# Altium PCB MANWOLF.PcbDoc
Units mm, origin at the board's own origin, x right, y up, seen from the top; angles counter-clockwise.
Board outline 152.4 x 101.6 mm, 4 copper layers (Top Layer, Signal Layer 1, Signal Layer 2, Bottom Layer), stack 0.778 mm thick; 93 components, 122 nets, 420 pads, 48 vias.
Unrouted connection lines stored in the file: 131.
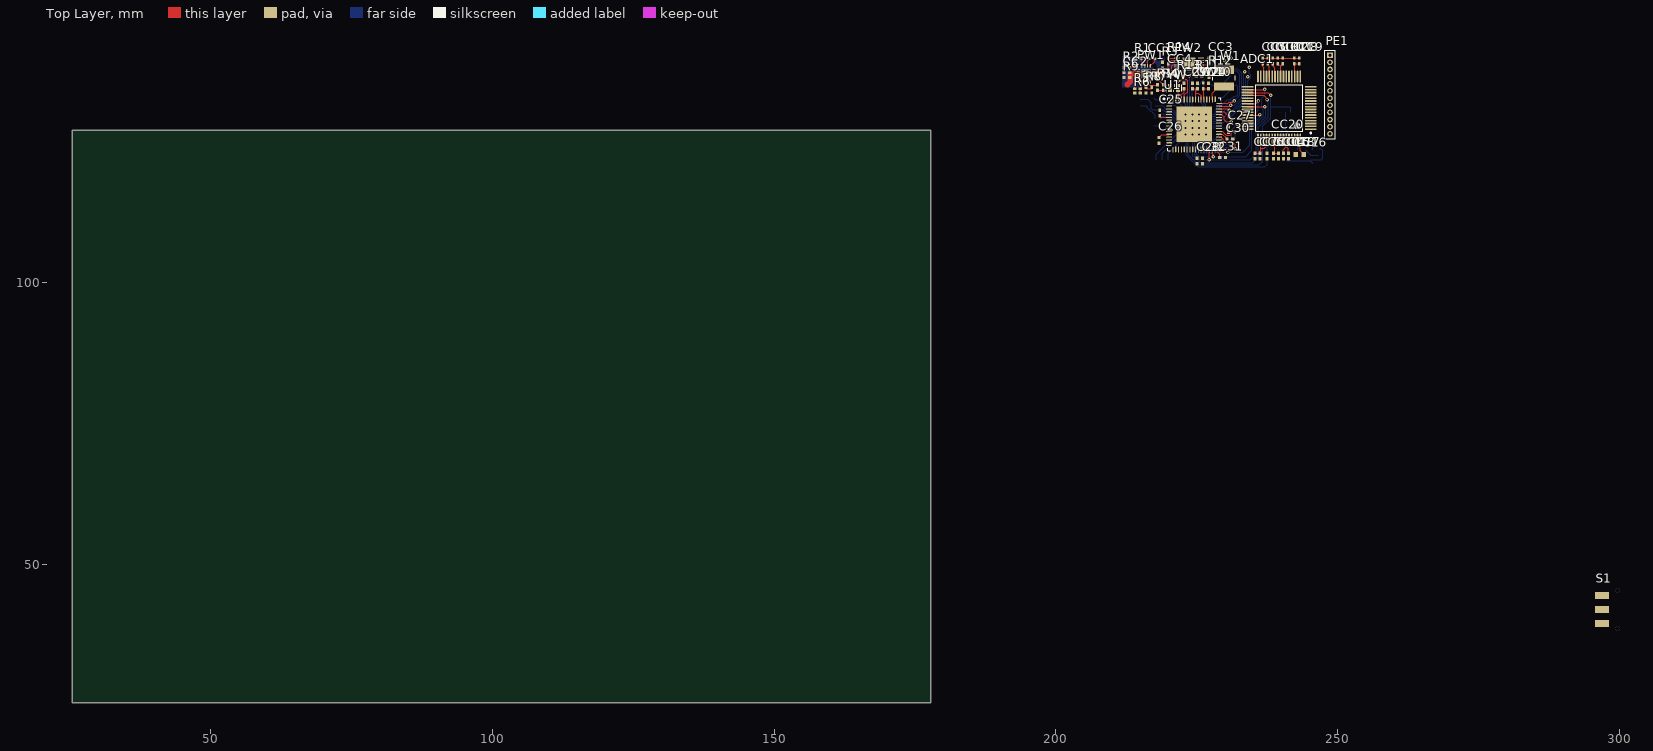
[diagram p0: Top Layer view]
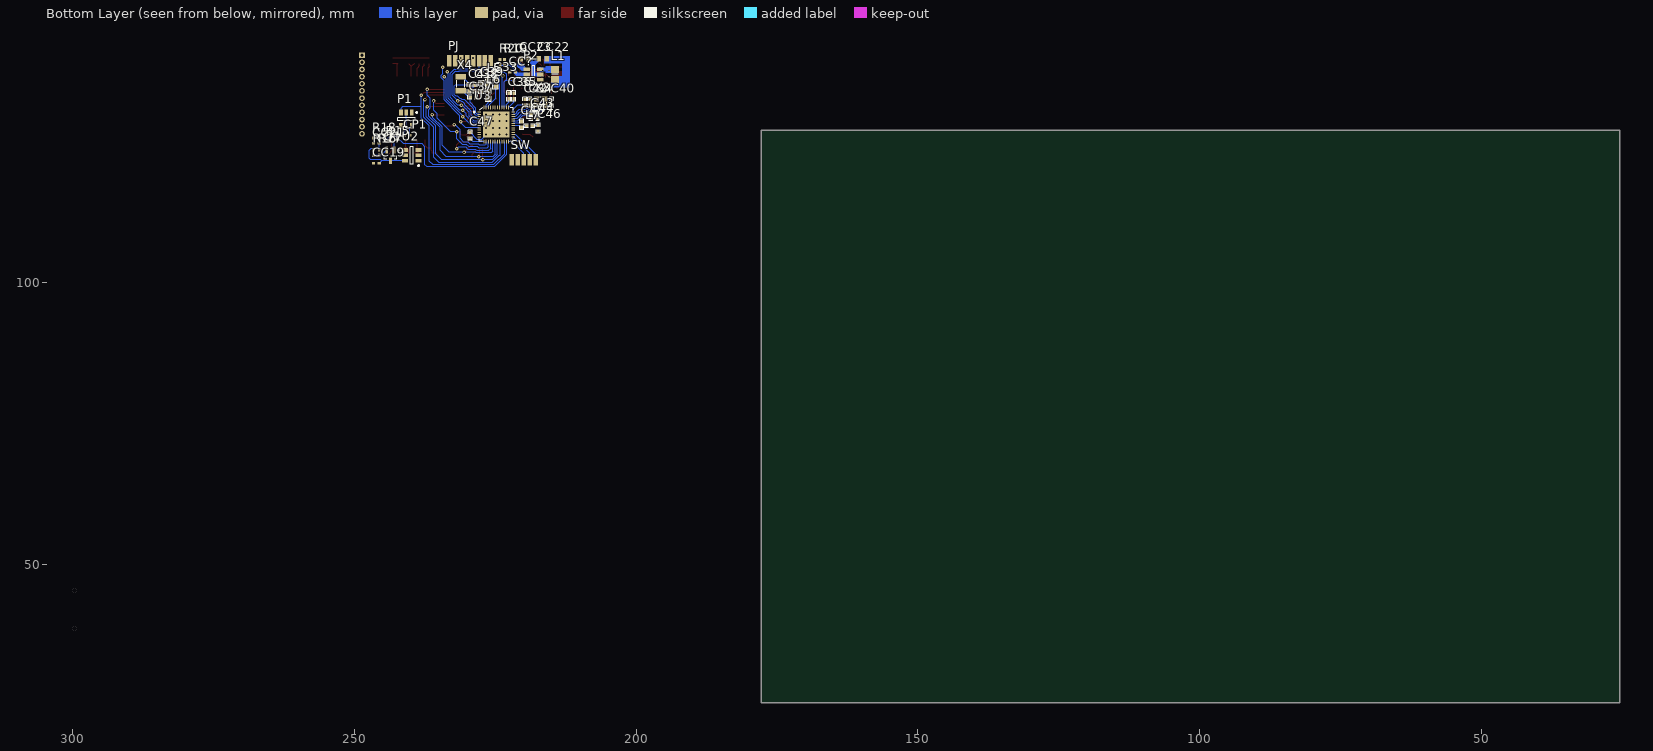
[diagram p1: Bottom Layer view, seen from below]
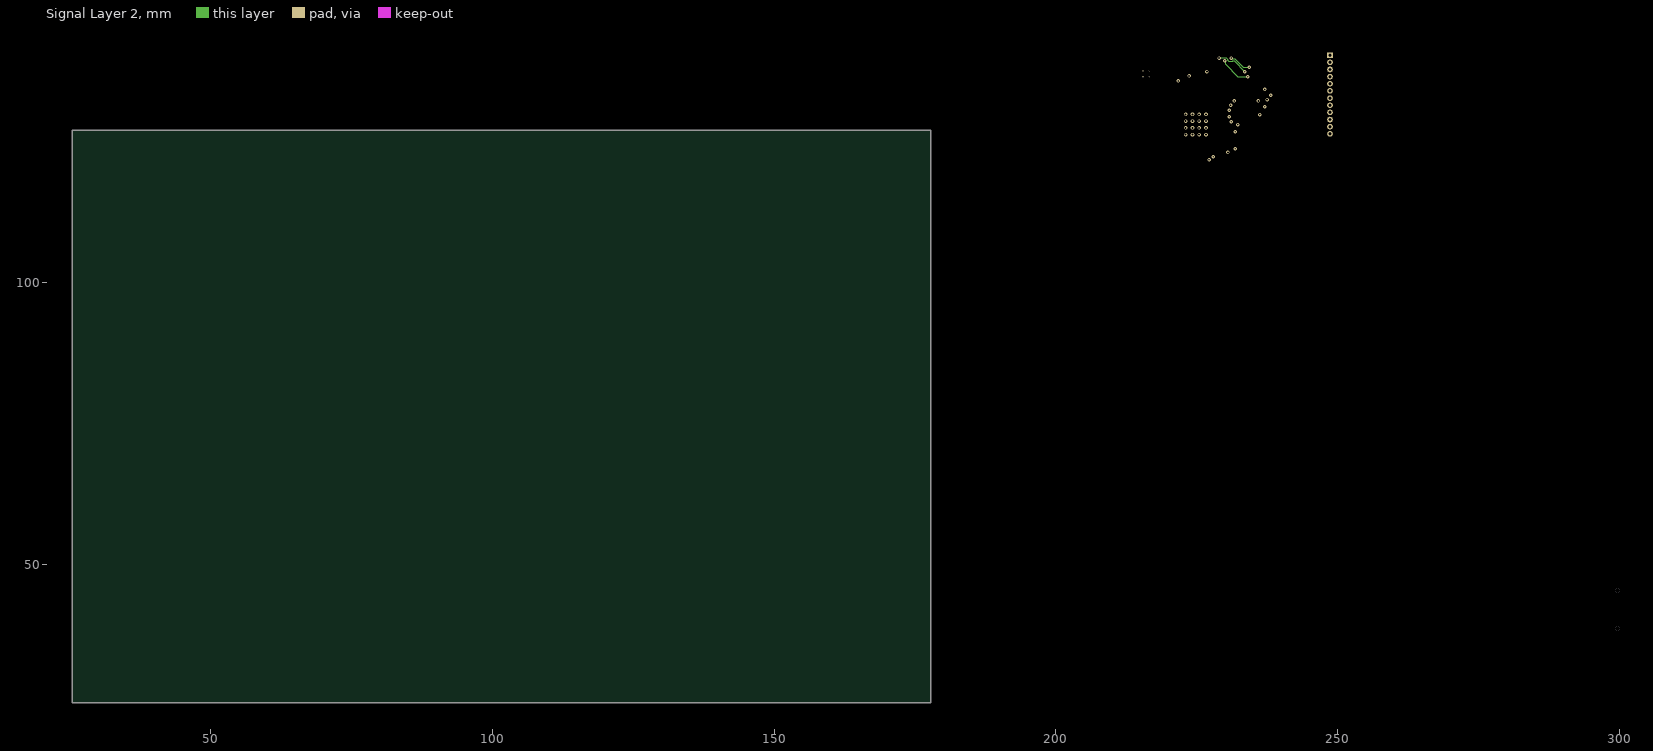
[diagram p2: Signal Layer 2]

## Layer stack, top to bottom
Top Solder: solder mask 0.0102, Solder Resist, Dk 3.5
Top Layer: signal copper 0.0356
Dielectric 1: core 0.254, FR-4, Dk 4.2
Signal Layer 1: signal copper 0.036
Dielectric 3: prepreg 0.127, Dk 4.2
Signal Layer 2: signal copper 0.036
Dielectric 2: core 0.254, Dk 4.2
Bottom Layer: signal copper 0.0356
Bottom Solder: solder mask 0.0102, Solder Resist, Dk 3.5

## Board outline
25.4,25.4 177.8,25.4 177.8,127 25.4,127

## Design rules (kind name [scope] priority, off if disabled: settings)
Clearance [All] p1: gap=0.15
PolygonConnect [All] p1: connectstyle=Relief reliefconductorwidth=0.254 reliefentries=4 polygonreliefangle="90 Angle" airgapwidth=0.254
RoomDefinition NRF52832 [InComponentClass('NRF52832')] p1: confinementstyle=ConfineIn formatcopy=TRUE lockcomponents=FALSE outline 0,0 50.8,0 50.8,25.4 0,25.4
RoomDefinition MRWOLF [InComponentClass('MRWOLF')] p2: confinementstyle=ConfineIn formatcopy=TRUE lockcomponents=FALSE outline 0,0 50.8,0 50.8,25.4 0,25.4
RoomDefinition ADC [InComponentClass('ADC')] p3: confinementstyle=ConfineIn formatcopy=TRUE lockcomponents=FALSE outline 0,0 50.8,0 50.8,25.4 0,25.4
RoomDefinition BATTERY [InComponentClass('BATTERY')] p4: confinementstyle=ConfineIn formatcopy=TRUE lockcomponents=FALSE outline 1.651,5.969 52.451,5.969 52.451,31.369 1.651,31.369
RoutingVias [All] p1: holewidth=0.3 width=0.62 viastyle="Through Hole" minholewidth=0.3 minwidth=0.62 maxholewidth=0.3 maxwidth=0.62
SolderMaskExpansion [All] p1: expansion=0.102
Width [All] p1: maxlimit=5 minlimit=0.2 preferedwidth=0.2
30 further rules are at their usual default settings.

## Classes and differential pairs
component class ADC: ADC1 CC5 CC6 CC7 CC8 CC9 CC10 CC11 CC12 CC13 CC14 CC15 CC16 CC17 CC18 CC19 CC20 CC21 PE1 Q1 R15 R16 R17 R18 U2
component class BATTERY: CC1 CC2 CC3 CC4 CC22 CC23 CC? CP1 L1 P1 P2 PW1 PW2 R1 R2 R3 R4 R5 R6 R7 R8 R9 R10 R11 R12 R13 R14 R19 R20 R? S1
component class MRWOLF: C10 C24 C25 C26 C27 C28 C29 C30 C31 C32 CW1 CW2 LW1 PJ U1 YW
component class NRF52832: C33 C34 C35 C36 C37 C38 C39 C40 C41 C42 C43 C44 C45 C46 C47 L5 L6 L7 SW U3 X3 X4

## Components (designator, comment, footprint, x,y, rotation, side; value= is the part's Value field where it differs from the comment)
ADC1 "ADS1298" LQFP64_M 239.649,130.953 r180 top
C10 "100nF" 0402 227.076,134.874 r270 top
C24 "100nF" 0402 226.187,134.882 r270 top
C25 "100nF" 0402 218.44,130.048 r270 top
C26 "100nF" 0402 218.313,125.222 r90 top
C27 "100nF" 0402 230.632,127.127 r90 top
C28 "100nF" 0402 225.044,121.539 r90 top
C29 "100nF" 0402 222.758,134.874 r270 top
C30 "100nF" 0402 230.886,125.476 r180 top
C31 "100nF" 0402 229.616,122.174 r180 top
C32 "100nF" 0402 226.06,121.539 r90 top
C33 "1.0µF" CAPC1608X06L 224.972,135.434 r270 bottom
C34 "12pF" CAPC1005X04L 218.876,131.955 r90 bottom
C35 "12pF" CAPC1005X04L 221.742,133.096 r90 bottom
C36 "12pF" CAPC1005X04L 222.631,133.096 r90 bottom
C37 "12pF" CAPC1005X04L 228.981,132.842 r180 bottom
C38 "100nF" CAPC1005X04L 228.6,134.493 r90 bottom
C39 "4.7µF" CAPC1608X06L 227.457,134.62 r90 bottom
C40 "12pF" CAPC1005X04L 215.011,131.953 r270 bottom
C41 "12pF" CAPC1005X04L 229.616,134.493 r270 bottom
C42 "100nF" CAPC1005X04L 219.765,131.955 r90 bottom
C43 "100pF" CAPC1005X04L 218.114,129.931 r180 bottom
C44 "N.C." CAPC1005X04L 218.114,129.042 r0 bottom
C45 "0.8pF" CAPC1005X04L 220.345,128.016 r270 bottom
C46 "12pF" CAPC1005X04L 217.424,127.381 r90 bottom
C47 "100nF" CAPC1005X04L 229.489,126.111 r90 bottom
CC1 "Cap Semi" 0402 217.043,139.692 r0 top
CC2 "Cap Semi" 0402 212.598,137.279 r0 top
CC3 "Cap Semi" 0402 227.203,139.311 r90 top
CC4 "Cap Semi" 0402 219.964,137.152 r90 top
CC5 "Cap Semi" 0402 236.728,139.327 r270 top
CC6 "Cap Semi" 0402 236.22,122.436 r90 top
CC7 "Cap Semi" 0402 235.331,122.436 r90 top
CC8 "Cap Semi" 0402 242.316,139.327 r270 top
CC9 "Cap Semi" 0402 243.205,139.327 r270 top
CC10 "Cap Semi" 0402 238.506,139.327 r270 top
CC11 "Cap Semi" 0402 240.284,139.327 r270 top
CC12 "Cap Semi" 0402 239.395,139.327 r270 top
CC13 "Cap Semi" 0402 237.617,139.327 r270 top
CC14 "Cap Semi" 0402 238.633,122.428 r90 top
CC15 "Cap Semi" 0402 239.522,122.428 r90 top
CC16 "Cap Semi" 1608[0603] 243.332,122.69 r0 top
CC17 "Cap Semi" 0402 241.3,122.436 r90 top
CC18 "Cap Semi" 0402 240.411,122.436 r90 top
CC19 "Cap Semi" 0402 246.126,121.158 r180 bottom
CC20 "Cap Semi" 0402 237.49,122.436 r90 top
CC21 "Cap Semi" 0402 246.126,124.714 r180 bottom
CC22 "Cap Semi" 1608[0603] 216.587,139.7 r180 bottom
CC23 "Cap Semi" 1608[0603] 219.762,139.7 r0 bottom
CC? "Cap Semi" 0402 221.921,137.287 r0 bottom
CP1 "Cap Semi" 0402 240.665,126.111 r180 bottom
CW1 "4.7uF" 0402 225.171,134.874 r270 top
CW2 "100nF" 0402 224.282,134.874 r270 top
L1 "" 6-0805_N 214.428,136.906 r270 bottom
L5 "15nH" INDC1005X04L 226.369,135.561 r270 bottom
L6 "10µH" INDC1608X06L 226.242,133.275 r270 bottom
L7 "3.9nH" INDC1005X04L 218.948,127.762 r180 bottom
LW1 "SRN4026-220M" BOUR-IND-SRN4026 229.87,136.271 r270 top
P1 "ADP122_3" UJ-5_N 240.792,128.958 r270 bottom
P2 "LTC3560" SOT23-6_N 218.238,136.906 r0 bottom
PE1 "MHDR1X12" MHDR1X12 248.666,140.335 r270 top
PJ "Header 8" HEADER8 229.497,139.319 r0 bottom
PW1 "BQ24075" RGT0016C_SMALL 214.63,137.787 r0 top
PW2 "BQ27441-G1" DRZ12_SMALL 226.247,137.803 r180 top
Q1 "PMSS3906" SOT323_N 243.631,122.555 r270 bottom
R1 "590" 0402 214.63,139.692 r180 top
R2 "10K" 0402 212.606,138.168 r0 top
R3 "1.1K" 0402 218.948,138.549 r270 top
R4 "10K" 0402 219.075,134.612 r270 top
R5 "Res3" 0402 214.503,134.358 r0 top
R6 "Res3" 0402 214.503,133.604 r0 top
R7 "Res3" 0402 217.043,134.112 r90 top
R8 "Res3" 0402 216.027,134.112 r90 top
R9 "100K" 0402 212.598,136.39 r180 top
R10 "10K" 0402 218.059,134.612 r270 top
R11 "10K" 0402 225.425,136.644 r0 top
R12 "10K" 0402 227.203,136.906 r90 top
R13 "10K" 0402 222.123,136.644 r0 top
R14 "0.01" 0402 219.964,139.311 r90 top
R15 "4.7K" 0402 243.758,124.968 r180 bottom
R16 "4.7K" 0402 246.634,123.063 r270 bottom
R17 "4.7K" 0402 245.618,123.063 r90 bottom
R18 "22K" 0402 246.126,125.603 r180 bottom
R19 "300K" 0402 223.393,139.065 r270 bottom
R20 "150K" 0402 224.155,139.065 r90 bottom
S1 "SW-SPDT" JS102011SAQN 296.926,39.45 r90 top
SW "Header 5" HEADER5 219.964,121.793 r180 bottom
U1 "Mr. Wolf PULP" QFN50P900X900X100_HS_NOVIAS_65M 224.548,128.036 r0 top
U2 "LT1790" SOT-23_A_N 239.821,122.555 r0 bottom
U3 "nRF52832-QFAB" QFN40P600X600X90-48N 224.845,128.026 r180 bottom
X3 "32MHz" BT-XTAL_2016 216.971,131.955 r0 bottom
X4 "32.768kHz" XTAL_3215 231.14,135.255 r90 bottom
YW "32.768kHz" SiT1533-C 220.98,134.493 r0 top

## Footprints (in the part's own frame and the unit in brackets; to place one, negate y for a bottom-side part, rotate by r counter-clockwise, add the part's x,y. Pads: shape width x height; smd on the part's side, far side on the other; paste and mask are expansions set on the pad)
6-0805_N [mm] "Chip Resistor, Body 2.0x1.2mm, IPC Medium Density"
  rect 1.2x1.4 smd: 1(-0.9,0) 2(0.9,0)
  silkscreen extent 0,-0.6 0,0.6, body extent -1.07,-0.7 1.07,0.7, height 0.7
0402 [mm] "Chip Capacitor, Body 1.0x0.5mm, IPC High Density"
  rect 0.6x0.5 smd: 1(-0.5,0) 2(0.5,0)
  body extent -0.55,-0.3 0.55,0.3, height 1.3
1608[0603] [mm] "Chip Capacitor, Body 1.6x0.8mm, IPC High Density"
  rect 0.8x0.9 smd: 1(-0.7,0) 2(0.7,0)
  body extent -0.87,-0.48 0.87,0.48, height 1.3
BOUR-IND-SRN4026 [mm] "Semi-shielded Power Inductors"
  rect 1.5x3.6 smd: 1(-1.5,0) 2(1.5,0)
  silkscreen extent -0.4,-2 0.4,2, body extent -1.95,-1.95 1.95,1.96, height 2.15
BT-XTAL_2016 [mm]
  rect 0.95x0.85 smd: 1(-0.725,-0.575) 2(0.725,-0.575) 3(0.725,0.575) 4(-0.725,0.575)
  silkscreen extent -1.08,-0.88 1.08,0.88, body extent -1.05,-0.85 1.05,0.85, height 0.56
CAPC1005X04L [mm]
  rect 0.6x0.5 smd: 1(-0.5,0) 2(0.5,0)
  silkscreen extent -0.9,-0.35 0.9,0.35, body extent -0.51,-0.25 0.51,0.25, height 0.5
CAPC1608X06L [mm]
  rect 0.75x0.8 smd: 1(-0.675,0) 2(0.675,0)
  silkscreen extent -1.17,-0.5 1.17,0.5, body extent -0.8,-0.43 0.8,0.43, height 0.8
DRZ12_SMALL [mm]
  rect 2.3x2.3 smd: 0(2.6,-1)
  rect 1.1x0.2 smd: 1(0.5,0)
  oval 1.1x0.2 smd: 2(0.5,-0.4) 3(0.5,-0.8) 4(0.5,-1.2) 5(0.5,-1.6) 6(0.5,-2) 7(4.75,-2) 8(4.75,-1.6) 9(4.75,-1.2) 10(4.75,-0.8) 11(4.75,-0.4) 12(4.75,0)
HEADER5 [mm]
  rect 0.8x2 smd: 1(-2.1,0) 2(-1.05,0) 3(0,0) 4(1.05,0) 5(2.1,0)
HEADER8 [mm]
  rect 0.8x2 smd: 1(-3.7,0) 2(-2.65,0) 3(-1.6,0) 4(-0.55,0) 5(0.5,0) 6(1.55,0) 7(2.6,0) 8(3.65,0)
INDC1005X04L [mm]
  rect 0.65x0.5 smd: 1(-0.475,0) 2(0.475,0)
  silkscreen extent -0.9,-0.35 0.9,0.35, body extent -0.5,-0.3 0.5,0.3, height 0.5
INDC1608X06L [mm]
  rect 0.75x0.8 smd: 1(-0.675,0) 2(0.675,0)
  silkscreen extent -1.18,-0.5 1.17,0.5, body extent -0.8,-0.48 0.8,0.47, height 0.8
JS102011SAQN [mm]
  rect 1.2x2.5 smd: 1(0,0) 2(2.5,0) 3(5,0)
LQFP64_M [mm] "Thin QFP, 64-Leads, Body 10x10mm, Pitch 0.5mm, IPC Low Density"
  oval 2.1x0.3 smd: 1(-5.6,3.75) 2(-5.6,3.25) 3(-5.6,2.75) 4(-5.6,2.25) 5(-5.6,1.75) 6(-5.6,1.25) 7(-5.6,0.75) 8(-5.6,0.25) 9(-5.6,-0.25) 10(-5.6,-0.75) 11(-5.6,-1.25) 12(-5.6,-1.75) 13(-5.6,-2.25) 14(-5.6,-2.75) 15(-5.6,-3.25) 16(-5.6,-3.75) 33(5.6,-3.75) 34(5.6,-3.25) 35(5.6,-2.75) 36(5.6,-2.25) 37(5.6,-1.75) 38(5.6,-1.25) 39(5.6,-0.75) 40(5.6,-0.25) 41(5.6,0.25) 42(5.6,0.75) 43(5.6,1.25) 44(5.6,1.75) 45(5.6,2.25) 46(5.6,2.75) 47(5.6,3.25) 48(5.6,3.75)
  oval 0.3x2.1 smd: 17(-3.75,-5.6) 18(-3.25,-5.6) 19(-2.75,-5.6) 20(-2.25,-5.6) 21(-1.75,-5.6) 22(-1.25,-5.6) 23(-0.75,-5.6) 24(-0.25,-5.6) 25(0.25,-5.6) 26(0.75,-5.6) 27(1.25,-5.6) 28(1.75,-5.6) 29(2.25,-5.6) 30(2.75,-5.6) 31(3.25,-5.6) 32(3.75,-5.6) 49(3.75,5.6) 50(3.25,5.6) 51(2.75,5.6) 52(2.25,5.6) 53(1.75,5.6) 54(1.25,5.6) 55(0.75,5.6) 56(0.25,5.6) 57(-0.25,5.6) 58(-0.75,5.6) 59(-1.25,5.6) 60(-1.75,5.6) 61(-2.25,5.6) 62(-2.75,5.6) 63(-3.25,5.6) 64(-3.75,5.6)
  silkscreen extent -5.72,-4.15 4.15,4.57, body extent -5,-5 5,5, height 1.6
MHDR1X12 [mm] "Connector; Header; 12 Position"
  rect 1x1 hole 0.6: 1(0,0)
  round 1 hole 0.6: 2(1.27,0) 3(2.54,0) 4(3.81,0) 5(5.08,0) 6(6.35,0) 7(7.62,0) 8(8.89,0) 9(10.16,0) 10(11.43,0) 11(12.7,0) 12(13.97,0)
  silkscreen extent -0.9,-0.9 14.87,0.9
QFN40P600X600X90-48N [mm]
  oval 0.65x0.2 smd: 1(-3.025,2.2) 2(-3.025,1.8) 3(-3.025,1.4) 4(-3.025,1) 5(-3.025,0.6) 6(-3.025,0.2) 7(-3.025,-0.2) 8(-3.025,-0.6) 9(-3.025,-1) 10(-3.025,-1.4) 11(-3.025,-1.8) 12(-3.025,-2.2) 25(3.025,-2.2) 26(3.025,-1.8) 27(3.025,-1.4) 28(3.025,-1) 29(3.025,-0.6) 30(3.025,-0.2) 31(3.025,0.2) 32(3.025,0.6) 33(3.025,1) 34(3.025,1.4) 35(3.025,1.8) 36(3.025,2.2)
  oval 0.2x0.65 smd: 13(-2.2,-3.025) 14(-1.8,-3.025) 15(-1.4,-3.025) 16(-1,-3.025) 17(-0.6,-3.025) 18(-0.2,-3.025) 19(0.2,-3.025) 20(0.6,-3.025) 21(1,-3.025) 22(1.4,-3.025) 23(1.8,-3.025) 24(2.2,-3.025) 37(2.2,3.025) 38(1.8,3.025) 39(1.4,3.025) 40(1,3.025) 41(0.6,3.025) 42(0.2,3.025) 43(-0.2,3.025) 44(-0.6,3.025) 45(-1,3.025) 46(-1.4,3.025) 47(-1.8,3.025) 48(-2.2,3.025)
  rect 4.7x4.7 smd: 49(0,0)
  silkscreen extent -4.03,-3 3,3, body extent -3.02,-3.02 3.02,3.02, height 0.86
QFN50P900X900X100_HS_NOVIAS_65M [mm] "QFN, 64-Leads, Body 9.00x9.00mm, Pitch 0.50mm, Thermal Pad 6.30x6.30mm, IPC Low Density"
  oval 0.95x0.2 smd: 1(-4.475,3.75) 16(-4.475,-3.75) 33(4.475,-3.75) 48(4.475,3.75)
  oval 1.05x0.2 smd: 2(-4.425,3.25) 3(-4.425,2.75) 4(-4.425,2.25) 5(-4.425,1.75) 6(-4.425,1.25) 7(-4.425,0.75) 8(-4.425,0.25) 9(-4.425,-0.25) 10(-4.425,-0.75) 11(-4.425,-1.25) 12(-4.425,-1.75) 13(-4.425,-2.25) 14(-4.425,-2.75) 15(-4.425,-3.25) 34(4.425,-3.25) 35(4.425,-2.75) 36(4.425,-2.25) 37(4.425,-1.75) 38(4.425,-1.25) 39(4.425,-0.75) 40(4.425,-0.25) 41(4.425,0.25) 42(4.425,0.75) 43(4.425,1.25) 44(4.425,1.75) 45(4.425,2.25) 46(4.425,2.75) 47(4.425,3.25)
  oval 0.2x0.95 smd: 17(-3.75,-4.475) 32(3.75,-4.475) 49(3.75,4.475) 64(-3.75,4.475)
  oval 0.2x1.05 smd: 18(-3.25,-4.425) 19(-2.75,-4.425) 20(-2.25,-4.425) 21(-1.75,-4.425) 22(-1.25,-4.425) 23(-0.75,-4.425) 24(-0.25,-4.425) 25(0.25,-4.425) 26(0.75,-4.425) 27(1.25,-4.425) 28(1.75,-4.425) 29(2.25,-4.425) 30(2.75,-4.425) 31(3.25,-4.425) 50(3.25,4.425) 51(2.75,4.425) 52(2.25,4.425) 53(1.75,4.425) 54(1.25,4.425) 55(0.75,4.425) 56(0.25,4.425) 57(-0.25,4.425) 58(-0.75,4.425) 59(-1.25,4.425) 60(-1.75,4.425) 61(-2.25,4.425) 62(-2.75,4.425) 63(-3.25,4.425)
  rect 6.3x6.3 smd: 65(0,0)
  silkscreen extent -5.47,-4.7 4.7,4.7, body extent -4.6,-4.6 4.6,4.6, height 1
RGT0016C_SMALL [mm]
  rect 1.55x1.55 smd: 0(1.4,-0.75)
  oval 0.6x0.24 smd: 1(0,0) 2(0,-0.5) 3(0,-1) 4(0,-1.5) 9(2.8,-1.5) 10(2.8,-1) 11(2.8,-0.5) 12(2.8,0)
  oval 0.24x0.6 smd: 5(0.65,-2.15) 6(1.15,-2.15) 7(1.65,-2.15) 8(2.15,-2.15) 13(2.15,0.65) 14(1.65,0.65) 15(1.15,0.65) 16(0.65,0.65)
SiT1533-C [mm] "Ultra-Low Power Quartz XTAL Replacement - XTAL Compatible Footprint"
  rect 0.75x1.4 smd: 1(-0.725,0) 3(0.725,0)
  rect 0.2x0.5 smd: 2(-0.1,-0.45) 4(0.1,0.45)
  silkscreen extent -1.4,-0.85 1.35,0.6, body extent -1,-0.6 1,0.6, height 0.55
SOT23-6_N [mm] "SOT23, 6-Leads, Body 2.9x1.6mm, Pitch 0.95mm, Lead Span 2.7mm, IPC Medium Density"
  rect 1.1x0.65 smd: 1(-1.2,0.95) 2(-1.2,0) 3(-1.2,-0.95) 4(1.2,-0.95) 5(1.2,0) 6(1.2,0.95)
  silkscreen extent -1.32,-1.55 0.25,1.95, body extent -0.9,-1.55 0.9,1.55, height 1.45
SOT323_N [mm] "SOT323, 3-Leads, Body 2.0x1.3mm, Pitch 0.65mm, Lead Span 2.1mm, IPC Medium Density"
  rect 1.2x0.5 smd: 1(-0.95,0.65) 2(-0.95,-0.65) 3(0.95,0)
  silkscreen extent -1.07,-1.1 0.7,1.57, body extent -0.7,-1.1 0.7,1.1, height 1.1
SOT-23_A_N [mm] "SOT23, 6-Leads, Body 2.9x1.7mm, Pitch 0.95mm, Lead Span 2.8mm, IPC Medium Density"
  rect 1.1x0.65 smd: 1(-1.2,0.95) 2(-1.2,0) 3(-1.2,-0.95) 4(1.2,-0.95) 5(1.2,0) 6(1.2,0.95)
  silkscreen extent -1.32,-1.55 0.25,1.95, body extent -0.9,-1.55 0.9,1.55, height 1.45
UJ-5_N [mm] "SOT23, 5-Leads, Body 2.9x1.7mm, Pitch 0.95mm, Lead Span 2.8mm, IPC Medium Density"
  rect 1.1x0.65 smd: 1(-1.2,0.95) 2(-1.2,0) 3(-1.2,-0.95) 4(1.2,-0.95) 5(1.2,0.95)
  silkscreen extent -1.32,-1.55 0.25,1.95, body extent -0.9,-1.55 0.9,1.55, height 1
XTAL_3215 [mm]
  rect 1x1.8 smd: 1(-1.25,0) 2(1.25,0)
  silkscreen extent -0.6,-0.75 0.6,0.75, body extent -1.6,-0.75 1.6,0.75, height 0.81

## Part data
C10 C24 C25 C26 C27 C28 C29 C30 C31 C32 CW1 CW2: library part "Cap Semi", "Capacitor (Semiconductor SIM Model)"
C33: library part C0603-1µ0, "Capacitor, X7R, ±10%"
C34 C35 C36 C37 C40 C41: library part C0402-12p, "Capacitor, NP0, ±2%"
C38 C42 C47: library part C0402-100n, "Capacitor, X7R, ±10%"
C39: library part C0603-4µ7, "Capacitor, X5R, ±10%"
C43: library part C0402-100p, "Capacitor, NP0, ±5%"
C44: library part C0402-N.C., "Not mounted"
C45: library part C0402-0.8p, "Capacitor, NP0, ±5%"
C46: "Capacitor, NP0, ±2%"
CC1 CC2 CC3 CC4 CC5 CC6 CC7 CC8 CC9 CC10 CC11 CC12 CC13 CC14 CC15 CC16 CC17 CC18 CC19 CC20 CC21 CC22 CC23 CC? CP1: "Capacitor (Semiconductor SIM Model)"
L1: library part Inductor, "Inductor"
L5: library part L0402-15n, "High frequency chip inductor ±10%"
L6: library part L0603-10µ, "Chip inductor, IDC,min = 50 mA, ±20%"
L7: library part L0402-3n9, "High frequency chip inductor ±5%"
LW1: library part BOUR-IND-SRN4026-220M, "Semi-shielded Power Inductor, 22uH, 3A"
P1: library part ADP122, "Regulator"
PE1: "Header, 12-Pin"
PJ: "Header, 8-Pin"
Q1: "PNP Switching Transistor"
R1 R2 R3 R4 R9 R10 R11 R12 R13 R14 R15 R16 R17 R18 R19 R20: library part Res3, "Resistor"
R5 R6 R7 R8: "Resistor"
S1: "SPDT Subminiature Toggle Switch, Right Angle Mounting, Vertical Actuation"
SW: "Header, 5-Pin"
U1: library part PULP_MR_WOLF, "Mr. Wolf PULP Heterogeneous Multi-Core System-On-Chip"
U3: "Multi-protocol Bluetooth Low Energy, ANT and 2.4GHz proprietary system-on-chip"
X3: library part XTAL_SMD2016_32MHz_8pF_General, "XTAL SMD 2016, 32MHz, Cl=8pF, Total Tol: ±40ppm"
X4: library part XTAL_SMD3215_32.768kHz_9pF_General, "XTAL SMD 3215, 32.768kHz, Cl=9pF, Total Tol: ±50ppm"
YW: library part SIT-OSC32KHZ-SIT1533AC-H5-DCC-32.768, "20 ppm, Ultra-Low Power 32.768 kHz Quartz XTAL Replacement"

## Via types
v1: diameter 0.62, hole 0.3, Top Layer to Bottom Layer, 26 vias
v2: diameter 0.66, hole 0.33, Top Layer to Bottom Layer, 16 vias
v3: diameter 0.3, hole 0.2, Top Layer to Bottom Layer, 4 vias
v4: diameter 0.9, hole 0.9, Top Layer to Bottom Layer, 2 vias

## Nets (pads, with @x,y where several pads share a name; then routed paths per layer and width w, separated by ;. In a path a pad name is that pad's centre, name@x,y a point inside that pad or via, vN(x,y) a via of type N, cw(c..) or ccw(c..) an arc to the next point about the centre after c; other vN are vias at no path point)
AGND: ADC1.20 ADC1.23 ADC1.25 ADC1.32 ADC1.53 ADC1.57 ADC1.58 CC5.1 CC8.1 CC9.1 CC10.1 CC11.1 CC12.1 CC13.1 CC14.1 CC15.1 CC16.1 CC17.1 CC18.1 CC19.1 CC20.1 CC21.1 CP1.1 P1.2 PE1.12 R18.1 U2.1 U2.2 | length 10.7
  Top Layer w0.2: CC5.1 CC13.1 CC10.1 CC12.1 CC11.1 CC8.1 CC9.1
  Bottom Layer w0.2: P1.2 240.792,127.127 241.165,126.754 CP1.1
AVDD: ADC1.19 ADC1.21 ADC1.22 ADC1.54 ADC1.56 ADC1.59 CC8.2 CC9.2 CC17.2 CC18.2 CC20.2 CP1.2 P1.5 PE1.11 U2.4 | length 8.9
  Top Layer w0.2: CC18.2 240.411,123.571 240.899,124.059 ; ADC1.59 240.899,124.059 ; CC17.2 241.26,122.976 241.26,123.698 240.899,124.059 ; ADC1.19 242.399,138.744 CC8.2 CC9.2
  Bottom Layer w0.2: P1.5 240.165,127.435 CP1.2
BAT_IN: CC4.2 PW2.6 PW2.8 R14.1 | length 2.9
  Top Layer w0.2: CC4.2 R14.1 220.556,139.403 PW2.8
BOOTSEL: U1.1 YW.4
CAM.DATA0: U1.19
CAM.DATA1: U1.20
CAM.DATA2: U1.21
CAM.DATA3: U1.22
CAM.DATA4: U1.23
CAM.DATA5: U1.24
CAM.DATA6: U1.25
CAM.DATA7: U1.27
CAM.HSYNC: U1.18
CAM.PCLK: U1.17
CAM.VSYNC: U1.28
CS#: ADC1.39 U1.38 U3.15 | length 23.2
  Top Layer w0.2: U1.38 229.569,126.786 230.278,126.077 230.986,126.077 231.132,126.223 231.132,126.756 v1(231.83,126.756) ; ADC1.39 235.462,131.703 v1(235.966,132.207)
  Bottom Layer w0.2: U3.15 226.245,124.051 226.496,123.8 227.858,123.8 228.093,124.035 229.61,124.035 230.045,124.47 230.814,124.47 231.83,125.486 231.83,126.746 232.791,126.746 232.801,126.756 ; v1(231.83,126.756) 232.801,126.756 ; v1(235.966,132.207) 235.966,130.556 235.331,129.921 235.331,129.159 232.928,126.756 232.801,126.756
CS_NRF#: U1.36 U3.16 | length 12.1
  Top Layer w0.2: U1.36 229.393,125.786 229.748,125.431 229.748,125.09 229.924,124.914 231.386,124.914 231.83,124.47 v1(231.83,123.708)
  Bottom Layer w0.2: U3.16 225.845,123.743 226.242,123.346 228.236,123.346 228.471,123.581 229.798,123.581 230.179,123.962 231.576,123.962 v1(231.83,123.708)
DEC1: C38.1 U3.1
DEC2: C44.2 U3.32 | length 3.8
  Bottom Layer w0.2: C44.2 218.629,129.042 219.127,129.54 220.218,129.54 221.132,128.626 U3.32
DEC3: C43.1 U3.33 | length 3.6
  Bottom Layer w0.2: C43.1 220.335,129.931 221.24,129.026 U3.33
DEC4: C33.2 L5.1 U3.46 | length 6.2
  Bottom Layer w0.2: U3.46 226.245,131.387 224.972,132.66 C33.2 225.113,134.759 226.369,136.015 L5.1
DGND: ADC1.33 ADC1.38 ADC1.41 ADC1.49 ADC1.51 CC6.1 CC7.1
DVDD: ADC1.48 ADC1.50 ADC1.52 C10.2 C24.2 C25.2 C26.2 C27.2 C28.2 C29.2 C30.2 C31.2 C32.2 C39.1 C42.1 C47.1 CC6.2 CC7.2 CC22.2 CC?.2 L1.2 PJ.8 R4.2 R10.2 R11.1 R12.1 R19.1 SW.2 U1.6 U1.12 U1.26 U1.29 U1.32 U1.37 U1.40 U1.52 U1.53 U1.61 U3.13 U3.36 U3.48 | length 24.2
  Top Layer w0.2: R10.2 R4.2 ; C26.2 218.829,126.238 220.075,126.238 U1.12 ; C25.2 218.702,129.286 U1.6 ; U1.61 222.298,133.271 222.758,133.731 C29.2 ; U1.53 226.298,134.271 C24.2 227.068,134.382 C10.2 ; U1.32 229.116,122.743 C31.2 ; U1.37 229.574,126.286 230.133,125.727 ; CC7.2 CC6.2 236.22,123.317 236.399,123.496 236.399,123.825 ; ADC1.50 236.399,123.825 ; ADC1.52 237.399,124.242 236.982,123.825 236.399,123.825
  Bottom Layer w0.2: C42.1 221.097,131.455 221.82,130.732 U3.36 ; U3.13 228.879,125.001 C47.1
EL1: ADC1.16 PE1.1
EL2: ADC1.14 PE1.2
EL3: ADC1.12 PE1.3
EL4: ADC1.10 PE1.4
EL5: ADC1.8 PE1.5
EL6: ADC1.6 PE1.6
EL7: ADC1.4 PE1.7
EL8: ADC1.2 PE1.8
GND: C10.1 C24.1 C25.1 C26.1 C27.1 C28.1 C29.1 C30.1 C31.1 C32.1 C33.1 C34.2 C35.2 C36.2 C37.2 C38.2 C39.2 C40.2 C41.2 C42.2 C43.2 C44.1 C45.1 C46.1 C47.2 CC1.1 CC2.1 CC3.1 CC4.1 CC22.1 CC23.1 CW1.1 CW2.1 P2.2 PJ.7 PW1.0 PW1.4 PW1.8 PW1.14 PW2.0 PW2.3 R1.2 R2.1 R3.1 R5.1 R7.1 R13.2 R20.2 S1.1 SW.1 U1.49 U1.65 U3.31 U3.45 U3.49 X3.2 X3.4 YW.2 | length 34.6
  Top Layer w0.2: R5.1 214.003,135.66 PW1.4 215.28,136.287 v3(215.48,136.487) PW1.0 ; PW1.0@216.03,136.387 PW1.0 ; PW1.14 216.28,139.302 CC1.1@216.607,139.629 ; PW1.8 216.78,136.287 PW1.0 ; R13.2 222.623,137.779 PW2.0 ; PW2.3 226.995,138.603 CC3.1
  Bottom Layer w0.2: C40.2 215.084,131.38 X3.4 216.246,131.037 217.614,129.669 C44.1 ; X3.2@217.416,132.81 X3.2 217.771,132.455 C34.2 C42.2 ; C45.1 220.635,128.226 U3.31 ; U3.49 v2(226.645,126.226) 227.52,125.351 228.229,125.351 C47.2 ; C39.2 227.759,134.993 C38.2 229.6,133.993 C41.2
  Bottom Layer w0.7: P2.2 218.238,136.906 218.238,138.749 ; CC22.1 218.238,138.749 ; CC23.1 219.062,139.573 218.238,138.749
  other v2: 223.045,126.226 224.245,126.226 225.445,126.226 223.045,127.426 224.245,127.426 225.445,127.426 226.645,127.426 223.045,128.626 224.245,128.626 225.445,128.626 226.645,128.626 223.045,129.826 224.245,129.826 225.445,129.826 226.645,129.826
  other v3: 216.58,136.487 215.48,137.587 216.58,137.587
HYPER_0.C\K\: U1.14
HYPER_0.C\S\: U1.15
HYPER_0.CK: U1.13
HYPER_0.DQ0: U1.10
HYPER_0.DQ1: U1.9
HYPER_0.DQ2: U1.8
HYPER_0.DQ3: U1.7
HYPER_0.DQ4: U1.5
HYPER_0.DQ5: U1.4
HYPER_0.DQ6: U1.3
HYPER_0.DQ7: U1.2
HYPER_0.RWDS: U1.11
HYPER_1.C\S\: U1.16
I2C.SCL: U1.63
I2C.SDA: U1.64
I2S0_SCK: U1.43
I2S0_SDI: U1.41
I2S0_WS: U1.42
I2S1_SDI: U1.39
JTAG.T\R\S\T\: PJ.2 U1.48 U3.4 | length 21
  Top Layer w0.2: U1.48 230.562,131.786 230.781,132.005 231.446,132.005 v1(231.648,132.207)
  Bottom Layer w0.2: PJ.2 226.847,138.241 227.547,137.541 231.394,137.541 231.426,137.509 232.144,137.509 232.664,136.989 232.664,133.223 v1(231.648,132.207) 231.159,132.207 230.977,132.025 230.801,132.025 230.453,131.677 230.453,131.537 229.266,130.35 229.266,129.698 228.594,129.026 U3.4
JTAG.TCK: PJ.6 U1.44 U3.8 | length 21.9
  Top Layer w0.2: U1.44 229.497,129.786 229.87,129.413 229.87,128.905 230.251,128.524 v1(231.14,128.524)
  Signal Layer 2 w0.2: v1(231.14,139.827) 231.298,139.669 231.793,139.669 233.286,138.176 v1(234.315,138.176)
  Bottom Layer w0.2: U3.8 229.955,127.426 ; 229.979,127.45 229.955,127.426 ; v1(231.14,128.524) 231.319,128.703 231.319,129.601 234.095,132.377 234.095,135.767 234.621,136.293 234.621,136.757 234.315,137.063 v1(234.315,138.176) ; v1@231.233,128.431 230.227,127.426 229.955,127.426
JTAG.TDI: PJ.3 U1.47 U3.5 | length 20.5
  Top Layer w0.2: U1.47 230.854,131.286 v1(231.013,131.445)
  Bottom Layer w0.2: U3.5 228.715,128.626 229.616,129.527 229.616,130.205 230.856,131.445 v1(231.013,131.445) 231.678,131.445 232.208,131.975 232.208,132.005 233.045,132.842 233.045,137.103 233.01,137.138 232.289,137.859 231.571,137.859 231.539,137.891 228.092,137.891 227.897,138.086 PJ.3
JTAG.TDO: PJ.4 U1.46 U3.6 | length 20
  Top Layer w0.2: U1.46 230.529,130.786 v1(230.759,130.556)
  Signal Layer 2 w0.2: v1(228.981,139.827) 229.033,139.879 230.229,139.879 230.557,139.551 230.557,139.394 230.684,139.267 231.372,139.267 231.424,139.319 231.648,139.319 v1(233.553,137.414)
  Bottom Layer w0.2: U3.6 228.81,128.226 230.124,129.54 230.124,129.921 v1(230.759,130.556) 231.284,130.556 233.395,132.667 233.395,137.256 v1(233.553,137.414)
JTAG.TMS: PJ.5 U1.45 U3.7 | length 19.7
  Top Layer w0.2: U1.45 229.886,130.286 v1(230.759,129.413)
  Signal Layer 2 w0.2: v1(229.997,139.319) 230.124,139.192 230.124,138.684 232.283,136.525 v1(234.061,136.525)
  Bottom Layer w0.2: U3.7 229.172,127.826 v1(230.759,129.413) 230.759,129.536 233.745,132.522 233.745,136.209 v1(234.061,136.525)
MISO: ADC1.43 U1.33 U3.17 | length 23.3
  Top Layer w0.2: U1.33 229.347,124.286 v1(230.56,123.073) ; ADC1.43 236.129,129.703 v1(236.22,129.794)
  Bottom Layer w0.2: U3.17 225.445,123.248 225.697,122.996 228.381,122.996 228.458,123.073 v1(230.56,123.073) v1@230.579,123.092 ; 229.137,123.092 v1@230.579,123.092 ; v1@230.589,123.102 v1@230.579,123.092 ; v1(236.22,129.794) 236.093,129.667 236.093,129.26 234.442,127.609 234.442,124.333 233.201,123.092 v1@230.579,123.092
MOSI: ADC1.34 U1.31 U3.18 | length 30.4
  Top Layer w0.2: U1.31 227.798,122.849 227.965,122.682 v1(227.965,122.322) ; ADC1.34 237.073,134.203 v1(237.109,134.239)
  Bottom Layer w0.2: U3.18 225.045,122.746 225.459,122.332 229.29,122.332 ; v1(227.965,122.322) 233.701,122.322 234.823,123.444 234.823,127.495 236.855,129.527 236.855,130.653 236.549,130.959 236.549,132.663 237.109,133.223 v1(237.109,134.239)
NetC45_2: C45.2 L7.1 U3.30 | length 2.4
  Bottom Layer w0.2: L7.1@219.423,127.635 220.21,127.635 C45.2@220.218,127.643 ; C45.2 220.655,127.826 U3.30
NetCC3_2: CC3.2 PW2.5 | length 1.6
  Top Layer w0.2: PW2.5 226.533,139.403 226.941,139.811 CC3.2
NetCC?_1: CC?.1 P2.5 R19.2 R20.1 | length 5.6
  Bottom Layer w0.3: CC?.1 221.421,137.601 222.385,138.565 R19.2 R20.1
  Bottom Layer w0.7: P2.5 221.04,136.906 CC?.1
NetL1_1: L1.1 P2.3 | length 2.6
  Bottom Layer w0.7: L1.1 216.988,137.806 P2.3
NetL5_2: L5.2 L6.1 | length 1.2
  Bottom Layer w0.2: L6.1 226.242,134.959 L5.2
NetL6_2: L6.2 U3.47 | length 1.7
  Bottom Layer w0.2: L6.2 226.242,131.885 226.595,131.532 226.595,131.101 U3.47
NetLW1_2: LW1.2 U1.50 | length 3.5
  Top Layer w0.2: U1.50 227.798,133.564 229.005,134.771 LW1.2@229.743,134.771
NetPW1_1: PW1.1 R2.2 | length 1.7
  Top Layer w0.2: R2.2 213.741,138.168 214.122,137.787 PW1.1
NetPW1_5: PW1.5 R5.2 R6.2 | length 2.3
  Top Layer w0.2: R6.2@215.003,133.477 R5.2 215.28,134.635 PW1.5
NetPW1_6: PW1.6 R7.2 R8.2 | length 2.4
  Top Layer w0.2: PW1.6 215.78,134.597 216.027,134.35 R7.2@217.043,134.35
NetPW1_12: PW1.12 R3.2 | length 1.6
  Top Layer w0.2: PW1.12 218.686,137.787 R3.2
NetPW1_16: PW1.16 R1.1 | length 1.5
  Top Layer w0.2: R1.1@215.011,139.827 215.28,139.558 PW1.16
NetPW2_10: PW2.10 R13.1 | length 3.5
  Top Layer w0.2: PW2.10 220.78,138.603 220.599,138.422 220.599,137.152 221.107,136.644 R13.1
NetQ1_1: Q1.1 R15.2 | length 1.6
  Bottom Layer w0.2: Q1.1 242.981,124.691 R15.2
NetQ1_2: Q1.2 R16.2 R17.1 | length 2.7
  Bottom Layer w0.2: Q1.2 245.223,122.563 245.536,122.563 R16.2@246.552,122.563
NetR9_2: R9.2 S1.3
NetU1_62: U1.62 YW.3 | length 2
  Top Layer w0.2: YW.3@221.742,134.53 221.752,134.52 U1.62@221.752,132.507
P0.00/XL1: C37.1 U3.2 X4.1 | length 6.1
  Bottom Layer w0.2: U3.2 227.92,129.876 228.24,129.876 228.445,130.081 228.445,130.909 229.481,131.945 C37.1 229.743,132.842 231.14,134.239 X4.1@231.14,134.259
P0.01/XL2: C41.1 U3.3 X4.2 | length 13.2
  Bottom Layer w0.2: U3.3 227.92,129.476 228.335,129.476 228.854,129.995 228.854,130.81 230.419,132.375 230.832,132.375 231.037,132.58 231.229,132.58 231.416,132.767 231.446,132.767 231.712,133.032 231.979,133.032 232.29,133.344 232.29,134.863 232.144,135.009 C41.1@229.616,135.009 ; C41.1 C41.1@229.616,135.009 ; X4.2@231.14,136.759 229.616,135.235 C41.1@229.616,135.009
P0.07: U3.9
P0.08: U3.10
P0.09: U3.11
P0.10: U3.12
P0.11: ADC1.47 U3.14 | length 10.7
  Top Layer w0.2: v1(232.283,128.016) 232.283,127.762 232.342,127.703 ADC1.47
  Bottom Layer w0.2: U3.14 226.645,124.448 226.771,124.322 227.738,124.322 227.905,124.489 229.422,124.489 229.827,124.895 230.604,124.895 231.27,125.561 231.27,127.13 232.156,128.016 v1(232.283,128.016)
P0.17: ADC1.36 U3.20 | length 30.3
  Top Layer w0.2: ADC1.36 236.875,133.203 237.617,132.461 v1(237.49,132.461)
  Bottom Layer w0.2: U3.20 224.245,122.439 224.362,122.439 225.599,121.202 234.994,121.202 235.966,122.174 235.966,127.508 237.744,129.286 237.744,132.207 v1(237.49,132.461)
P0.18: U3.21
P0.19: ADC1.35 P1.3 U3.22 | length 37.6
  Top Layer w0.2: ADC1.35 234.073,133.679 237.669,133.679 v1(238.125,133.223)
  Bottom Layer w0.2: U3.22 223.445,122.744 225.337,120.852 236.041,120.852 236.728,121.539 236.728,127.775 238.125,129.172 238.125,131.191 ; v1(238.125,133.223) 238.125,131.191 ; P1.3 241.742,130.937 241.488,131.191 238.125,131.191
P0.20: R15.1 U3.23 | length 29.2
  Bottom Layer w0.2: U3.23 223.045,122.649 225.192,120.502 237.088,120.502 237.49,120.904 237.49,124.079 237.998,124.587 241.3,124.587 242.57,125.857 243.84,125.857 244.258,125.439 R15.1
P0.21/RESET: SW.3 U3.24 | length 4.7
  Bottom Layer w0.2: SW.3 219.964,122.936 222.029,125.001 U3.24
P0.22: U3.27
P0.23: U3.28
P0.24: U3.29
P0.25: C35.1 U3.37 | length 1.9
  Bottom Layer w0.2: C35.1 221.742,131.954 U3.37
P0.26: C36.1 U3.38 | length 1.7
  Bottom Layer w0.2: C36.1 222.631,131.953 223.045,131.539 U3.38
P0.27: PJ.1 U1.60 U3.39 | length 17.8
  Top Layer w0.2: v1(221.742,135.763) 222.123,135.763 222.377,136.017 223.139,136.017 223.393,135.763 223.393,133.858 222.798,133.263 U1.60
  Bottom Layer w0.2: v1(221.742,135.763) 223.012,135.763 ; U3.39 223.445,135.584 223.266,135.763 223.012,135.763 ; PJ.1@225.425,139.319 PJ.1 225.552,139.074 225.552,137.795 225.044,137.287 223.393,137.287 223.012,136.906 223.012,135.763
P0.28/AIN4: PW2.1 R11.2 U3.40 | length 9.5
  Top Layer w0.2: v1(223.647,136.644) 224.316,137.313 225.747,137.313 ; PW2.1 225.747,137.313 ; R11.2 225.747,136.822 225.747,137.313
  Bottom Layer w0.2: v1(223.647,136.644) v1@223.795,136.496 ; v1@223.795,136.758 223.795,131.101 U3.40
P0.29/AIN5: PW2.2 R12.2 U3.41 | length 11
  Top Layer w0.2: PW2.2 226.414,138.203 226.822,137.795 v1(226.822,137.422) 226.973,137.422 R12.2@227.203,137.652
  Bottom Layer w0.2: U3.41 224.245,136.511 224.468,136.734 225.476,136.734 225.558,136.652 225.941,136.652 226.822,137.533 v1(226.822,137.422) 226.933,137.422 227.052,137.541 v1@227.076,137.517
P0.30/AIN6: PW1.9 R4.1 U3.42 | length 2.1
  Top Layer w0.2: PW1.9@217.43,136.275 217.92,136.275 219.075,135.12 R4.1
P0.31/AIN7: PW1.7 R10.1 U3.43 | length 2.2
  Top Layer w0.2: PW1.7 PW1.7 216.281,135.374 216.662,134.993 217.94,134.993 R10.1
POR_N: U1.57
REF: ADC1.1 ADC1.3 ADC1.5 ADC1.7 ADC1.9 ADC1.11 ADC1.13 ADC1.15 PE1.9
REF1.5V: CC21.2 PE1.10 R17.2 R18.2 | length 2.1
  Bottom Layer w0.2: R17.2@245.536,123.563 245.626,123.653 CC21.2 R18.2
REF2V: CC19.2 Q1.3 R16.1 U2.6 | length 9.2
  Bottom Layer w0.2: U2.6 Q1.3 245.179,121.605 ; CC19.2 245.179,121.605 ; 246.888,123.698 247.142,123.698 247.396,123.444 247.396,122.047 247.142,121.793 245.364,121.793 245.179,121.608 245.179,121.605
RF: C46.2 L7.2 | length 1.1
  Bottom Layer w0.2: C46.2 217.543,127.762 L7.2
SCK: ADC1.40 U1.30 U3.19 | length 28.2
  Top Layer w0.2: v1(227.203,121.762) 227.203,123.516 U1.30 ; ADC1.40 234.061,131.191 v1(237.109,131.191)
  Bottom Layer w0.2: U3.19 224.645,122.651 225.534,121.762 v1(227.203,121.762) 234.538,121.762 235.585,122.809 235.585,127.762 237.236,129.413 237.236,131.064 v1(237.109,131.191)
SPIM_SDIO2: U1.34
SPIM_SDIO3: U1.35
SWDCLK: SW.4 U3.25 | length 5.2
  Bottom Layer w0.2: SW.4 218.914,122.92 U3.25
SWDIO: SW.5 U3.26 | length 6.3
  Bottom Layer w0.2: SW.5 217.864,122.741 221.349,126.226 U3.26
SYSOFF: PW1.15 S1.2
UART.RX: U1.58
UART.TX: U1.59
VBAT: CC2.2 PW1.2 PW1.3 PW2.7 R9.1 R14.2 | length 5.3
  Top Layer w0.2: PW1.3 214.63,137.037 ; R14.2 219.972,139.803 PW2.7
  Top Layer w1: 212.725,135.12 213.233,135.628 213.233,137.025 213.245,137.037 214.63,137.037
VCAP1: ADC1.28 CC13.2 | length 2.4
  Top Layer w0.2: CC13.2 237.617,138.557 237.899,138.275 ADC1.28
VCAP2: ADC1.30 CC5.2 | length 2.3
  Top Layer w0.2: CC5.2 236.728,138.303 236.899,138.132 ADC1.30
VCAP3: ADC1.55 CC14.2 CC15.2 | length 3.4
  Top Layer w0.2: ADC1.55 238.899,123.194 CC14.2 CC15.2
VCAP4: ADC1.26 CC10.2 | length 2.4
  Top Layer w0.2: CC10.2 238.506,138.43 238.899,138.037 ADC1.26
VREFP: ADC1.24 CC11.2 CC12.2 | length 3.1
  Top Layer w0.2: CC12.2 239.899,138.323 ; ADC1.24 239.899,138.323 ; CC11.2 240.284,138.708 239.899,138.323
VREG: CW1.2 CW2.2 LW1.1 U1.54 U1.56 | length 4.7
  Top Layer w0.2: CW2.2 224.79,134.374 ; U1.56 224.798,133.604 ; CW1.2 224.79,134.374 ; U1.54 225.798,133.104 225.298,133.604 224.798,133.604 ; 224.79,134.374 224.798,134.366 224.798,133.604
VSYS: CC23.2 P1.1 P2.1 P2.4 PW1.10 PW1.11 R6.1 R8.1 | length 2.3
  Top Layer w1: 217.43,137.025 218.567,137.025 218.754,136.838
  Bottom Layer w0.2: P1.1@239.784,130.216 P1.1
  Bottom Layer w1: 220.143,138.049 220.651,138.557 220.778,138.557
VUSB: CC1.2 PW1.13 | length 1.6
  Top Layer w0.2: PW1.13 217.543,139.2 CC1.2
WCT: ADC1.64 CC16.2 | length 2.9
  Top Layer w0.2: ADC1.64 243.399,123.323 CC16.2
XC1: C40.1 U3.34 X3.1 | length 9.2
  Bottom Layer w0.2: C40.1 215.088,132.53 X3.1 ; X3.1@216.35,132.53 216.971,131.909 216.971,130.851 217.162,130.661 219.061,130.661 219.41,130.312 220.589,130.312 220.895,130.006 220.895,129.936 221.361,129.47 221.361,129.426 U3.34 221.817,129.423 221.361,129.423
XC2: C34.1 U3.35 X3.3 | length 4.9
  Bottom Layer w0.2: X3.3 218.816,131.38 218.876,131.44 219.631,130.686 220.85,130.686 221.245,130.291 221.245,130.081 221.5,129.826 U3.35
pads on no net: ADC1.17 ADC1.18 ADC1.27 ADC1.29 ADC1.31 ADC1.37 ADC1.42 ADC1.44 ADC1.45 ADC1.46 ADC1.60 ADC1.61 ADC1.62 ADC1.63 P1.4 P2.6 PW2.4 PW2.9 PW2.11 PW2.12 U1.51 U1.55 U2.3 U2.5 U3.44 YW.1
copper on no net: | length 0.1
  Top Layer w0.2: 220.255,134.366 220.345,134.456
  other v4: 299.676,38.55 299.676,45.35

## Other copper
Bottom Layer:
  rectangle net DVDD: 211.761,138.811 216.333,140.208
  rectangle net DVDD: 211.761,134.62 215.063,136.652
  rectangle net NetL1_1: 213.793,137.16 216.079,138.43
  rectangle net DVDD: 211.761,134.62 213.158,140.208